# Altium PCB 三轮主控板基础板2.3.PcbDoc (part 2 of 2)
Units mil, origin at the board's own origin, x right, y up, seen from the top; angles counter-clockwise.
Board outline 6000 x 4000 mil, 2 copper layers (Top Layer, Bottom Layer); 78 components, 90 nets, 319 pads, 48 vias.
Unrouted connection lines stored in the file: 1.
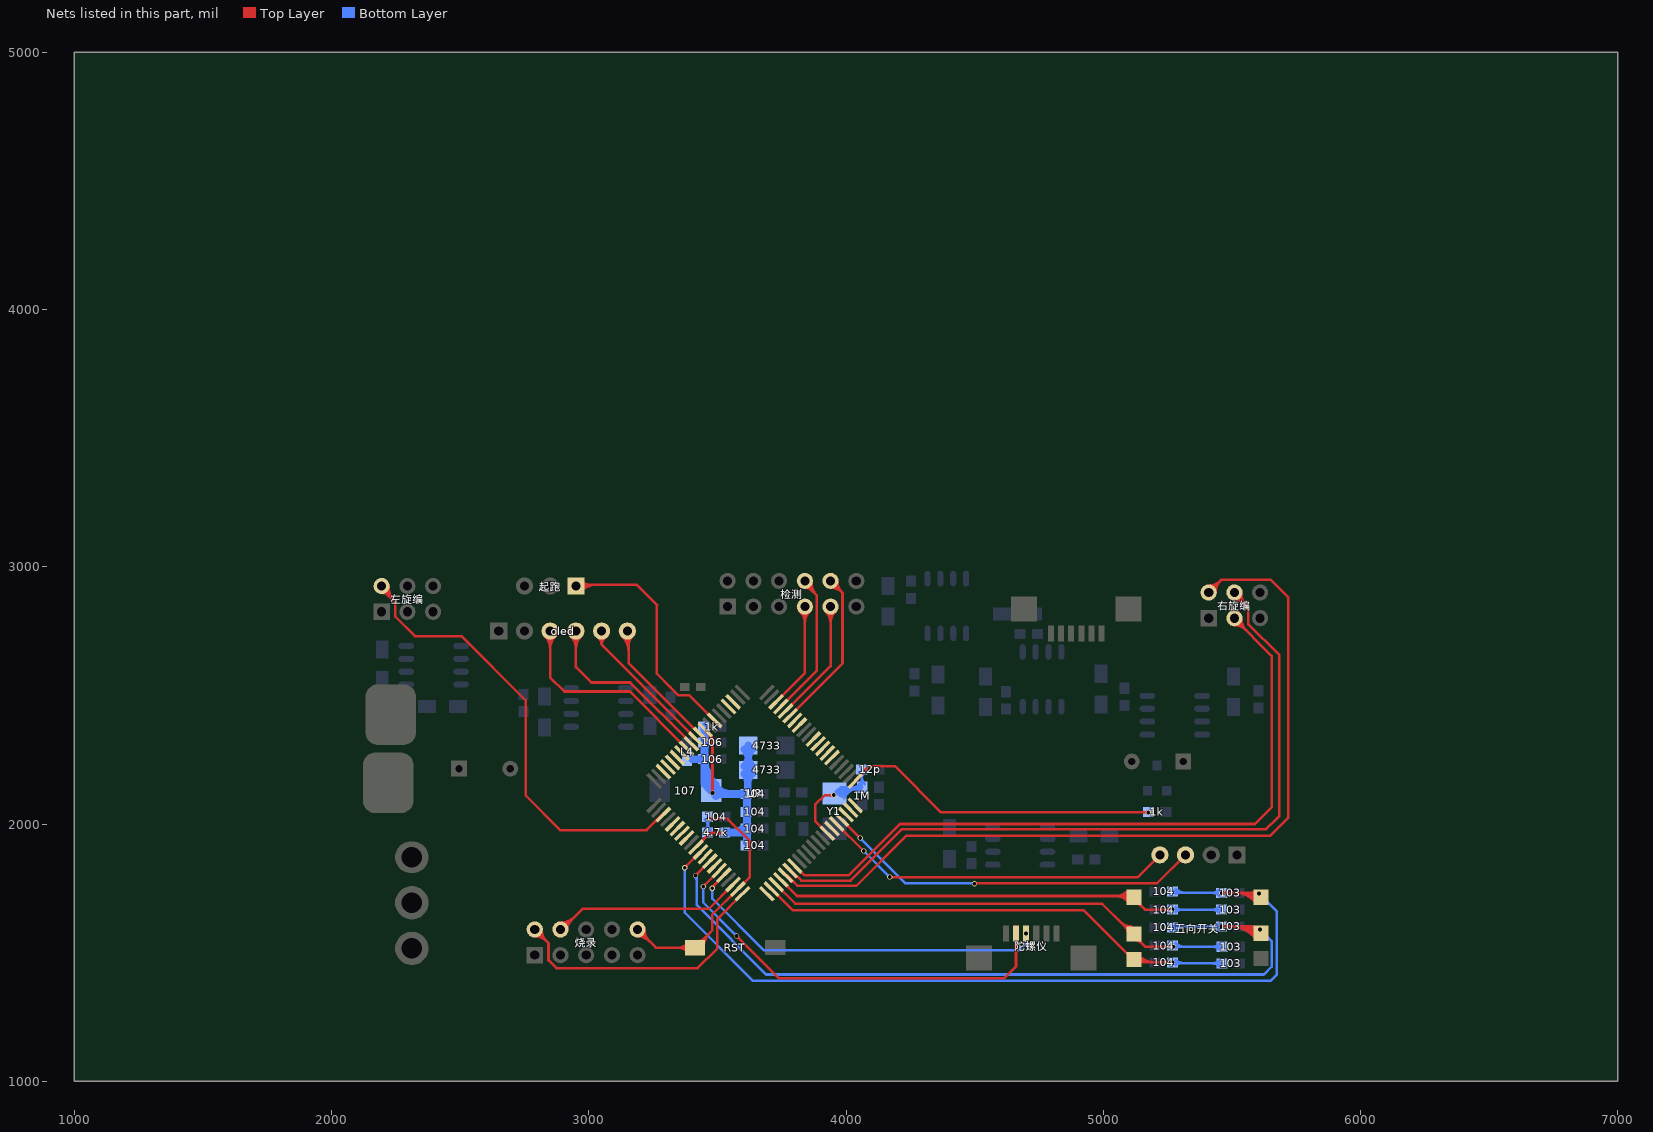
[diagram p2: the nets of this part, all layers, seen from the top]

## Via types
v1: diameter 20, hole 15, Top Layer to Bottom Layer, 41 vias
v2: diameter 30, hole 20, Top Layer to Bottom Layer, 4 vias
v3: diameter 50, hole 28, Top Layer to Bottom Layer, 3 vias

## Nets (pads, with @x,y where several pads share a name; then routed paths per layer and width w, separated by ;. In a path a pad name is that pad's centre, name@x,y a point inside that pad or via, vN(x,y) a via of type N, cw(c..) or ccw(c..) an arc to the next point about the centre after c; other vN are vias at no path point) (continued)
PTC7: U?.63 左旋编.2 | length 2384.2
  Top Layer w10: 左旋编.2@2191.5,2924.86 ccw(c2226.45,2926.29) 2217.4,2892.5 ; 左旋编.2@2195,2898.5 cw(c2195,2860.5) 2221.87,2887.37 ; 左旋编.2@2195,2925 2195,2914.24 2248.5,2860.74 2248.5,2805.74 2324.24,2730 2505,2730 2755,2480 2755,2110 2888.5,1976.5 3224.84,1976.5 3284.82,2036.48 U?.63@3290.05,2036.48 ; 左旋编.2@2193.93,2918.59 cw(c2188.7,2887.24) 2219.41,2895.46 ; 左旋编.2@2193.93,2918.59 cw(c2188.7,2887.24) 2219.41,2895.46 ; 左旋编.2@2193.93,2918.59 cw(c2188.7,2887.24) 2219.41,2895.46 ; 左旋编.2@2211.5,2925 ccw(c2277.29,2925) 2230.77,2878.48 ; 左旋编.2@2211.5,2925 ccw(c2277.29,2925) 2230.77,2878.48 ; 左旋编.2@2211.5,2925 ccw(c2277.29,2925) 2230.77,2878.48 ; 左旋编.2@2221.5,2925 ccw(c2311.43,2925) 2247.84,2861.41 ; 左旋编.2@2221.5,2925 ccw(c2311.43,2925) 2247.84,2861.41 ; 左旋编.2@2221.5,2925 ccw(c2311.43,2925) 2247.84,2861.41 ; 3256.32,2007.98 cw(c3268.48,1995.83) U?.63@3268.48,2013.02 ; 3256.32,2007.98 cw(c3268.48,1995.83) U?.63@3268.48,2013.02 ; 3256.32,2007.98 cw(c3268.48,1995.83) U?.63@3268.48,2013.02 ; 3260.29,2010.82 ccw(c3257.49,2021.25) U?.63@3266.84,2015.85 ; 3260.29,2010.82 ccw(c3257.49,2021.25) U?.63@3266.84,2015.85 ; 3260.29,2010.82 ccw(c3257.49,2021.25) U?.63@3266.84,2015.85
PTD0: 103.2@5462.07,1458 104.2@5269,1462 U?.2 五向开关.3 | length 2836
  Top Layer w10: U?.2@3710.42,1746.96 3792.38,1665 4922.93,1665 5109.15,1478.78 5125.93,1462 v1(5269,1462) ; 五向开关.3@5120.78,1470.07 cw(c5135.1,1459.33) 五向开关.3@5144.05,1474.83 ; 五向开关.3@5128.16,1463.28 cw(c5135.81,1457.04) 5140.75,1465.59 cw(c5147.82,1477.85) 五向开关.3@5133.67,1478.19 ; 五向开关.3@5128.78,1464.07 cw(c5144.18,1452.53) 5153.81,1469.2 ; 5256.93,1462 cw(c5256.93,1449.93) 5265.46,1458.46 ccw(c5256.93,1449.93) 5256.93,1462 ; 5256.93,1462 ccw(c5256.93,1474.07) 5265.46,1465.54 cw(c5256.93,1474.07) 5256.93,1462 ; 五向开关.3@5105.28,1474.91 ccw(c5136.45,1506.08) 5136.45,1462 cw(c5136.45,1506.08) 五向开关.3@5105.28,1474.91 ; 五向开关.3@5112.35,1481.98 ccw(c5160.59,1530.22) 5160.59,1462 cw(c5160.59,1530.22) 五向开关.3@5112.35,1481.98 ; 五向开关.3@5119.42,1489.05 ccw(c5184.73,1554.36) 5184.73,1462 cw(c5184.73,1554.36) 五向开关.3@5119.42,1489.05 ; 五向开关.3@5126.49,1496.12 ccw(c5208.87,1578.5) 5208.87,1462 cw(c5208.87,1578.5) 五向开关.3@5126.49,1496.12
  Bottom Layer w10: 104.2@5273,1458 103.2@5462.07,1458 ; 104.2@5281.65,1460.27 ccw(c5278.14,1454.19) 104.2@5272.8,1458.75 ; 104.2@5272.8,1458.75 cw(c5278.78,1453.62) 104.2@5282.72,1460.44 ; 104.2@5272.8,1458.75 cw(c5278.78,1453.62) 104.2@5282.72,1460.44 ; 104.2@5272.8,1458.75 cw(c5278.78,1453.62) 104.2@5282.72,1460.44 ; 5424.65,1458 cw(c5424.65,1422.55) 5449.72,1447.62 ccw(c5424.65,1422.55) 5424.65,1458 ; 5424.65,1458 ccw(c5424.65,1493.45) 5449.72,1468.38 cw(c5424.65,1493.45) 5424.65,1458 ; 104.2@5272.54,1465.54 ccw(c5290.73,1483.73) 5290.73,1458 cw(c5290.73,1483.73) 104.2@5272.54,1465.54 ; 104.2@5274.28,1465.31 ccw(c5291.94,1482.97) 5291.94,1458 cw(c5291.94,1482.97) 104.2@5274.28,1465.31 ; 104.2@5281.35,1451.62 cw(c5296.76,1436.2) 5296.76,1458 ccw(c5296.76,1436.2) 104.2@5281.35,1451.62 ; 104.2@5281.35,1472.38 ccw(c5316.08,1507.11) 5316.08,1458 cw(c5316.08,1507.11) 104.2@5281.35,1472.38
PTD1: U?.1
PTD2: U?.58
PTD3: U?.57
PTD4: U?.56
PTD5: U?.28
PTD6: U?.27
PTD7: U?.26
PTE0: U?.76 陀螺仪.3 | length 1542.5
  Top Layer w10: v1@3475,1750 3526.25,1801.25 U?.76@3525.29,1801.25 ; v1@3485,1750 cw(c3509.14,1750) 3492.07,1767.07 ccw(c3509.14,1750) v1@3485,1750
  Bottom Layer w10: v1(3480,1750) 3480,1710 3680,1510 4675,1510 4700,1535 v1(4700,1575) ; 3480,1737.93 cw(c3492.07,1737.93) 3483.54,1746.46 ccw(c3492.07,1737.93) 3480,1737.93 ; 3480,1737.93 ccw(c3467.93,1737.93) 3476.46,1746.46 cw(c3467.93,1737.93) 3480,1737.93
PTE1: U?.75 陀螺仪.2 | length 1838.4
  Top Layer w10: v1(3445,1757.14) U?.75@3507.2,1819.34 ; v1(3575,1565) 3740,1400 4614.57,1400 4660.94,1446.37 陀螺仪.2@4660.94,1573.98 ; 3453.54,1765.68 cw(c3445,1774.21) 3445,1762.14 ccw(c3445,1774.21) 3453.54,1765.68 ; 3453.54,1765.68 ccw(c3462.07,1757.14) 3450,1757.14 cw(c3462.07,1757.14) 3453.54,1765.68 ; 3583.54,1556.46 cw(c3592.07,1565) 3580,1565 ccw(c3592.07,1565) 3583.54,1556.46 ; 3583.54,1556.46 ccw(c3575,1547.93) 3575,1560 cw(c3575,1547.93) 3583.54,1556.46 ; 陀螺仪.2@4660.94,1587.85 cw(c4677.39,1587.85) 4665.76,1599.48 ccw(c4677.39,1587.85) 陀螺仪.2@4660.94,1587.85 ; 陀螺仪.2@4660.94,1587.85 ccw(c4644.5,1587.85) 4656.13,1599.48 cw(c4644.5,1587.85) 陀螺仪.2@4660.94,1587.85
  Bottom Layer w10: v1(3445,1757.14) 3445,1695 v1(3575,1565) ; 3445,1745.07 cw(c3457.07,1745.07) 3448.54,1753.61 ccw(c3457.07,1745.07) 3445,1745.07 ; 3445,1745.07 ccw(c3432.93,1745.07) 3441.46,1753.61 cw(c3432.93,1745.07) 3445,1745.07 ; 3566.46,1573.54 cw(c3557.93,1565) 3570,1565 ccw(c3557.93,1565) 3566.46,1573.54 ; 3566.46,1573.54 ccw(c3575,1582.07) 3575,1570 cw(c3575,1582.07) 3566.46,1573.54
PTE2: U?.68
PTE3: U?.67
PTE4: U?.47 起跑.1 | length 1379.5
  Top Layer w10: 起跑.1@2955,2930 3187,2930 3266,2851 3265,2850 3265,2584.03 3318.46,2530.57 3347.78,2501.25 3390.41,2501.25 U?.47@3489.1,2402.56 ; 起跑.1@2963.06,2911.94 cw(c3006.65,2868.35) 3006.65,2930 ; 起跑.1@2963.06,2911.94 cw(c3006.65,2868.35) 3006.65,2930 ; 起跑.1@2963.06,2911.94 cw(c3006.65,2868.35) 3006.65,2930 ; 起跑.1@2970.13,2904.87 cw(c3030.79,2844.21) 3030.79,2930 ; 起跑.1@2970.13,2904.87 cw(c3030.79,2844.21) 3030.79,2930 ; 起跑.1@2970.13,2904.87 cw(c3030.79,2844.21) 3030.79,2930 ; 起跑.1@2970.13,2945.13 ccw(c3006.65,2981.65) 3006.65,2930 ; 起跑.1@2970.13,2945.13 ccw(c3006.65,2981.65) 3006.65,2930 ; 起跑.1@2970.13,2945.13 ccw(c3006.65,2981.65) 3006.65,2930
PTE5: 1k.1@5176,2047 U?.21 | length 1341.5
  Top Layer w10: U?.21@4036.14,2167.33 U?.21@4043.81,2175 ; U?.21@4045,2175 U?.21@4043.81,2175 ; v1@5180,2045 4370,2045 4190,2225 4090,2225 4043.81,2178.81 U?.21@4043.81,2175 ; U?.21@4056.77,2190.54 ccw(c4051.37,2199.89) 4061.8,2197.09 ; U?.21@4056.77,2190.54 ccw(c4051.37,2199.89) 4061.8,2197.09 ; U?.21@4056.77,2190.54 ccw(c4051.37,2199.89) 4061.8,2197.09 ; U?.21@4059.6,2188.9 cw(c4073.36,2188.9) 4063.63,2198.63 ; U?.21@4059.6,2188.9 cw(c4073.36,2188.9) 4063.63,2198.63 ; U?.21@4059.6,2188.9 cw(c4073.36,2188.9) 4063.63,2198.63 ; 5162.93,2045 cw(c5162.93,2032.93) 5171.46,2041.46 ccw(c5162.93,2032.93) 5162.93,2045 ; 5162.93,2045 ccw(c5162.93,2057.07) 5171.46,2048.54 cw(c5162.93,2057.07) 5162.93,2045
  other v1: 5175,2045
PTE6: U?.20 | length 1.2
  Top Layer w10: U?.20@4036.14,2072.67 U?.20@4037.33,2072.67
PTE7: U?.6 右旋编.4 | length 3344.5
  Top Layer w10: U?.6@3787.2,1819.34 3826.54,1780 4018.28,1780 4218.28,1980 5633.28,1980 5675,2021.72 5685,2031.72 5685,2656.5 5563.5,2777.99 5563.5,2839.49 5510,2892.99 右旋编.4@5510,2900 ; 右旋编.4@5509.37,2893.53 cw(c5506.65,2865.59) 5533.77,2872.85 ; U?.6@3804.38,1795.87 cw(c3804.38,1780.69) 3815.11,1791.43 ; U?.6@3804.38,1795.87 cw(c3804.38,1780.69) 3815.11,1791.43 ; U?.6@3804.38,1795.87 cw(c3804.38,1780.69) 3815.11,1791.43 ; U?.6@3806.01,1798.71 ccw(c3815.36,1804.11) 3812.57,1793.68 ; U?.6@3806.01,1798.71 ccw(c3815.36,1804.11) 3812.57,1793.68 ; U?.6@3806.01,1798.71 ccw(c3815.36,1804.11) 3812.57,1793.68 ; 右旋编.4@5510,2873.5 cw(c5510,2826.46) 5543.27,2859.72 ccw(c5510,2826.46) 右旋编.4@5510,2873.5 ; 右旋编.4@5526.5,2900 ccw(c5583.24,2900) 5543.12,2859.88 cw(c5583.24,2900) 右旋编.4@5526.5,2900 ; 右旋编.4@5536.5,2900 ccw(c5617.38,2900) 5560.19,2842.81 cw(c5617.38,2900) 右旋编.4@5536.5,2900
PTF0: U?.55
PTF1: U?.54
PTF2: U?.44
PTF3: U?.43
PTF4: U?.38 检测.7 | length 641.8
  Top Layer w10: U?.38@3728.52,2474.95 3785,2531.43 3840,2586.43 检测.7@3840,2845 ; 检测.7@3821.26,2826.26 cw(c3776.03,2781.03) 3840,2781.03 cw(c3903.97,2781.03) 检测.7@3858.74,2826.26 ; 3840,2805.18 cw(c3879.82,2805.18) 3851.66,2833.34 ccw(c3879.82,2805.18) 3840,2805.18 ; 3840,2805.18 ccw(c3800.18,2805.18) 3828.34,2833.34 cw(c3800.18,2805.18) 3840,2805.18
PTF5: U?.37 检测.8 | length 804.1
  Top Layer w10: U?.37@3746.61,2456.85 3825,2535.24 3825.24,2535.24 3886.5,2596.5 3886.5,2888.5 ; 检测.8@3840,2918.5 cw(c3840,2878.68) 3868.16,2906.84 ; 检测.8@3840,2945 3840,2935 3886.5,2888.5 ; 3886.49,2888.51 cw(c3935.48,2937.5) 3866.41,2942.92 ccw(c3935.48,2937.5) 3886.49,2888.51 ; 检测.8@3856.45,2943.71 ccw(c3907.04,2939.73) 3871.15,2903.85 cw(c3907.04,2939.73) 检测.8@3856.45,2943.71
PTF6: U?.36 检测.9 | length 704.4
  Top Layer w10: U?.36@3764.71,2438.75 3940,2614.04 检测.9@3940,2845 ; 检测.9@3921.26,2826.26 cw(c3876.03,2781.03) 3940,2781.03 cw(c4003.97,2781.03) 检测.9@3958.74,2826.26 ; 3940,2805.18 cw(c3979.82,2805.18) 3951.66,2833.34 ccw(c3979.82,2805.18) 3940,2805.18 ; 3940,2805.18 ccw(c3900.18,2805.18) 3928.34,2833.34 cw(c3900.18,2805.18) 3940,2805.18
PTF7: U?.35 检测.10 | length 954
  Top Layer w10: U?.35@3782.8,2420.66 3986.5,2624.35 3986.5,2898.5 检测.10@3940,2945 ; 3968.16,2916.84 cw(c3996.32,2945) 3956.5,2945 ccw(c3996.32,2945) 3968.16,2916.84 ; 3968.16,2916.84 ccw(c3940,2888.68) 3940,2928.5 cw(c3940,2888.68) 3968.16,2916.84 ; 3985.23,2899.77 cw(c4030.46,2945) 3966.5,2945 ccw(c4030.46,2945) 3985.23,2899.77 ; 3985.23,2899.77 ccw(c3940,2854.54) 3940,2918.5 cw(c3940,2854.54) 3985.23,2899.77
PTG0: U?.74
PTG1: 103.1@5459.93,1602 104.1@5269,1598 U?.73 五向开关.5 | length 4445
  Top Layer w10: v1(3415.48,1800) U?.73@3471.01,1855.53 ; v1(5459.93,1602) 5580.85,1602 ; 5552.21,1593.65 ccw(c5566.4,1617.6) 五向开关.5@5585.78,1597.61 ; 5563.47,1586.97 ccw(c5575.84,1607.86) 五向开关.5@5592.74,1590.43 ; 5578.69,1575.76 ccw(c5547.36,1570.25) 5563.27,1597.8 ccw(c5574.36,1617.02) 五向开关.5@5587.89,1599.44 ; 五向开关.5@5602.85,1580 5580.85,1602 ; 3424.01,1808.54 cw(c3415.48,1817.07) 3415.48,1805 ccw(c3415.48,1817.07) 3424.01,1808.54 ; 3424.01,1808.54 ccw(c3432.55,1800) 3420.48,1800 cw(c3432.55,1800) 3424.01,1808.54 ; 5472,1602 cw(c5472,1614.07) 5463.46,1605.54 ccw(c5472,1614.07) 5472,1602 ; 5472,1602 ccw(c5472,1589.93) 5463.46,1598.46 cw(c5472,1589.93) 5472,1602 ; 5580.85,1602 ccw(c5600.85,1621.99) 五向开关.5@5608.62,1594.81 ; 5580.85,1602 ccw(c5600.85,1621.99) 五向开关.5@5608.62,1594.81 ; 5582.45,1597.88 ccw(c5599.11,1626.74) 五向开关.5@5608.58,1594.79 ; 5582.45,1597.88 ccw(c5599.11,1626.74) 五向开关.5@5608.58,1594.79 ; 5582.45,1597.88 ccw(c5599.11,1626.74) 五向开关.5@5608.58,1594.79 ; 5490.52,1602 cw(c5490.52,1467.67) 5585.51,1562.66 ccw(c5490.52,1467.67) 5490.52,1602 ; 5514.66,1602 cw(c5514.66,1491.81) 5592.58,1569.73 ccw(c5514.66,1491.81) 5514.66,1602 ; 5538.81,1602 cw(c5538.81,1515.96) 5599.65,1576.8 ccw(c5538.81,1515.96) 5538.81,1602 ; 5562.95,1602 cw(c5562.95,1540.1) 5606.72,1583.87 ccw(c5562.95,1540.1) 5562.95,1602 ; 五向开关.5@5592.86,1589.99 ccw(c5606.19,1603.31) 5611.38,1585.19 cw(c5606.19,1603.31) 五向开关.5@5592.86,1589.99
  Bottom Layer w10: v1(3415.48,1800) 3420,1795.48 3420,1684.64 3689.64,1415 5625,1415 5655,1445 5655,1545 v1(5610,1590) ; 3417.67,1786.55 cw(c3424.75,1790.64) v1@3419,1796.45 ; 104.1@5273,1602 v1(5459.93,1602) ; 5422.51,1602 cw(c5422.51,1566.55) 5447.58,1591.62 ccw(c5422.51,1566.55) 5422.51,1602 ; 5422.51,1602 ccw(c5422.51,1637.45) 5447.58,1612.38 cw(c5422.51,1637.45) 5422.51,1602 ; 103.1@5447.86,1602 cw(c5447.86,1589.93) 5456.39,1598.46 ccw(c5447.86,1589.93) 103.1@5447.86,1602 ; 103.1@5447.86,1602 ccw(c5447.86,1614.07) 5456.39,1605.54 cw(c5447.86,1614.07) 103.1@5447.86,1602 ; 5618.54,1581.46 cw(c5627.07,1590) 5615,1590 ccw(c5627.07,1590) 5618.54,1581.46 ; 5618.54,1581.46 ccw(c5610,1572.93) 5610,1585 cw(c5610,1572.93) 5618.54,1581.46 ; v1@3411.94,1796.46 cw(c3392.49,1777.01) 3420,1777.01 ccw(c3392.49,1777.01) v1@3411.94,1796.46 ; 104.1@5274.28,1594.69 cw(c5291.94,1577.03) 5291.94,1602 ccw(c5291.94,1577.03) 104.1@5274.28,1594.69 ; 104.1@5281.35,1587.62 cw(c5316.08,1552.89) 5316.08,1602 ccw(c5316.08,1552.89) 104.1@5281.35,1587.62 ; 104.1@5281.35,1608.38 ccw(c5296.76,1623.8) 5296.76,1602 cw(c5296.76,1623.8) 104.1@5281.35,1608.38
PTG2: U?.72
PTG3: 103.1@5461,1732 104.1@5269,1738 U?.71 五向开关.6 | length 4414
  Top Layer w10: v1(3373.09,1830) U?.71@3434.82,1891.72 ; v1(5461,1732) 五向开关.6@5590.85,1732 ; 五向开关.6@5602.85,1720 五向开关.6@5590.85,1732 ; v1@3373.09,1835 ccw(c3373.09,1847.07) 3381.63,1838.54 ; v1@3373.09,1835 ccw(c3373.09,1847.07) 3381.63,1838.54 ; v1@3373.09,1835 ccw(c3373.09,1847.07) 3381.63,1838.54 ; v1@3378.09,1830 cw(c3390.16,1830) 3381.63,1838.54 ; v1@3378.09,1830 cw(c3390.16,1830) 3381.63,1838.54 ; v1@3378.09,1830 cw(c3390.16,1830) 3381.63,1838.54 ; 5473.07,1732 cw(c5473.07,1744.07) 5464.54,1735.54 ccw(c5473.07,1744.07) 5473.07,1732 ; 5473.07,1732 ccw(c5473.07,1719.93) 5464.54,1728.46 cw(c5473.07,1719.93) 5473.07,1732 ; 5579.13,1727.01 ccw(c5586.1,1744.5) 五向开关.6@5601.03,1733.04 ; 5579.13,1727.01 ccw(c5586.1,1744.5) 五向开关.6@5601.03,1733.04 ; 5579.13,1727.01 ccw(c5586.1,1744.5) 五向开关.6@5601.03,1733.04 ; 五向开关.6@5590.85,1732 cw(c5590.85,1719.2) 5601.03,1726.97 ccw(c5590.85,1719.2) 五向开关.6@5590.85,1732 ; 五向开关.6@5591.41,1722.12 ccw(c5596.99,1736.14) 五向开关.6@5608.97,1726.96 ; 五向开关.6@5591.41,1722.12 ccw(c5596.99,1736.14) 五向开关.6@5608.97,1726.96 ; 五向开关.6@5591.41,1722.12 ccw(c5596.99,1736.14) 五向开关.6@5608.97,1726.96 ; 5514.66,1732 cw(c5514.66,1631.81) 5585.51,1702.66 ccw(c5514.66,1631.81) 5514.66,1732 ; 5538.81,1732 cw(c5538.81,1655.96) 5592.58,1709.73 ccw(c5538.81,1655.96) 5538.81,1732 ; 5562.95,1732 cw(c5562.95,1680.1) 5599.65,1716.8 ccw(c5562.95,1680.1) 5562.95,1732 ; 5572.61,1732 ccw(c5572.61,1750.24) 5585.51,1737.34 cw(c5572.61,1750.24) 5572.61,1732 ; 五向开关.6@5588.1,1732 cw(c5588.1,1713.1) 5601.46,1726.46 ccw(c5588.1,1713.1) 五向开关.6@5588.1,1732
  Bottom Layer w10: v1(3373.09,1830) 3373.09,1655.69 3638.79,1390 5650,1390 5675,1415 5675,1660 v1(5605,1730) ; 104.1@5275,1732 v1(5461,1732) ; 3373.09,1817.93 cw(c3385.16,1817.93) 3376.63,1826.46 ccw(c3385.16,1817.93) 3373.09,1817.93 ; 3373.09,1817.93 ccw(c3361.02,1817.93) 3369.56,1826.46 cw(c3361.02,1817.93) 3373.09,1817.93 ; 5423.58,1732 cw(c5423.58,1696.55) 5448.65,1721.62 ccw(c5423.58,1696.55) 5423.58,1732 ; 5423.58,1732 ccw(c5423.58,1767.45) 5448.65,1742.38 cw(c5423.58,1767.45) 5423.58,1732 ; 103.1@5448.93,1732 cw(c5448.93,1719.93) 5457.46,1728.46 ccw(c5448.93,1719.93) 103.1@5448.93,1732 ; 103.1@5448.93,1732 ccw(c5448.93,1744.07) 5457.46,1735.54 cw(c5448.93,1744.07) 103.1@5448.93,1732 ; 5613.54,1721.46 cw(c5622.07,1730) 5610,1730 ccw(c5622.07,1730) 5613.54,1721.46 ; 5613.54,1721.46 ccw(c5605,1712.93) 5605,1725 cw(c5605,1712.93) 5613.54,1721.46 ; 104.1@5274.28,1741.31 ccw(c5296.76,1763.8) 5296.76,1732 cw(c5296.76,1763.8) 104.1@5274.28,1741.31 ; 104.1@5281.35,1727.62 cw(c5291.94,1717.03) 5291.94,1732 ccw(c5291.94,1717.03) 104.1@5281.35,1727.62 ; 104.1@5281.35,1748.38 ccw(c5320.91,1787.94) 5320.91,1732 cw(c5320.91,1787.94) 104.1@5281.35,1748.38
PTG4: oled.3 U?.53 | length 1184.9
  Top Layer w10: oled.3@2840,2750 2850,2740 2850,2570 2905,2515 3159.52,2515 U?.53@3380.53,2293.99 ; 2850,2681.28 cw(c2918.72,2681.28) 2870.13,2729.87 ccw(c2918.72,2681.28) 2850,2681.28 ; 2850,2681.28 ccw(c2781.28,2681.28) 2829.87,2729.87 cw(c2781.28,2681.28) 2850,2681.28 ; 2850,2705.42 cw(c2894.58,2705.42) 2863.06,2736.94 ccw(c2894.58,2705.42) 2850,2705.42 ; 2850,2705.42 ccw(c2805.42,2705.42) 2836.94,2736.94 cw(c2805.42,2705.42) 2850,2705.42
PTG5: oled.4 U?.52 | length 1068.7
  Top Layer w10: oled.4@2950,2750 2950,2610 3010,2550 3160.71,2550 U?.52@3398.63,2312.09 U?.52@3397.91,2312.09 ; 2950,2681.28 cw(c3018.72,2681.28) 2970.13,2729.87 ccw(c3018.72,2681.28) 2950,2681.28 ; 2950,2681.28 ccw(c2881.28,2681.28) 2929.87,2729.87 cw(c2881.28,2681.28) 2950,2681.28 ; 2950,2705.42 cw(c2994.58,2705.42) 2963.06,2736.94 ccw(c2994.58,2705.42) 2950,2705.42 ; 2950,2705.42 ccw(c2905.42,2705.42) 2936.94,2736.94 cw(c2905.42,2705.42) 2950,2705.42
PTG6: oled.5 U?.51 | length 800.7
  Top Layer w10: oled.5@3050,2750 3050,2696.91 ; U?.51@3416.72,2330.18 3050,2696.91 ; 3050,2696.91 cw(c3085.28,2696.91) 3065.75,2726.29 ccw(c3085.28,2696.91) 3050,2696.91 ; 3050,2696.91 ccw(c3014.72,2696.91) 3034.25,2726.29 cw(c3014.72,2696.91) 3050,2696.91 ; 3050,2715.56 cw(c3072.89,2715.56) 3060.22,2734.62 ccw(c3072.89,2715.56) 3050,2715.56 ; 3050,2715.56 ccw(c3027.11,2715.56) 3039.78,2734.62 cw(c3027.11,2715.56) 3050,2715.56
PTG7: oled.6 U?.50 | length 822
  Top Layer w10: oled.6@3155,2750 3155,2625 U?.50@3413.34,2366.66 ; 3155,2693.35 cw(c3206.65,2693.35) 3170.13,2729.87 ccw(c3206.65,2693.35) 3155,2693.35 ; 3155,2693.35 ccw(c3093.35,2693.35) 3136.94,2736.94 cw(c3093.35,2693.35) 3155,2693.35 ; oled.6@3129.87,2729.87 cw(c3069.21,2669.21) 3155,2669.21 ccw(c3069.21,2669.21) oled.6@3129.87,2729.87 ; 3404.73,2375.27 ccw(c3413.24,2383.77) 3413.24,2371.74 cw(c3413.24,2383.77) 3404.73,2375.27
PTH0: U?.19
PTH1: U?.18
PTH2: U?.7 右旋编.3 | length 3114.2
  Top Layer w10: U?.7@3800.9,1837.44 3838.33,1800 4010,1800 4210,2000 5590,2000 5655,2065 5655,2653.72 右旋编.3@5510,2798.72 ; 右旋编.3@5510,2785 右旋编.3@5510,2798.72 ; 右旋编.3@5510,2800 右旋编.3@5510,2798.72 ; 右旋编.3@5510,2773.5 cw(c5510,2712.62) 5553.05,2755.67 ccw(c5510,2712.62) 右旋编.3@5510,2773.5 ; 右旋编.3@5510,2783.5 cw(c5510,2746.76) 5535.98,2772.74 ccw(c5510,2746.76) 右旋编.3@5510,2783.5 ; 右旋编.3@5526.5,2800 ccw(c5569.4,2800) 5539.06,2769.66 cw(c5569.4,2800) 右旋编.3@5526.5,2800 ; 右旋编.3@5536.5,2800 ccw(c5603.54,2800) 5556.13,2752.59 cw(c5603.54,2800) 右旋编.3@5536.5,2800
PTH3: U?.34
PTH4: U?.33
PTH5: U?.5 右旋编.2 | length 3688.9
  Top Layer w10: U?.5@3764.71,1801.25 3769.94,1801.25 3811.19,1760 4040,1760 4235,1955 5650,1955 5720,2025 5720,2880 5650,2950 5460,2950 右旋编.2@5410,2900 ; U?.5@3786.28,1777.78 cw(c3786.28,1760.59) 3798.44,1772.75 ; U?.5@3786.28,1777.78 cw(c3786.28,1760.59) 3798.44,1772.75 ; U?.5@3786.28,1777.78 cw(c3786.28,1760.59) 3798.44,1772.75 ; U?.5@3787.92,1780.62 ccw(c3797.27,1786.01) 3794.47,1775.59 ; U?.5@3787.92,1780.62 ccw(c3797.27,1786.01) 3794.47,1775.59 ; U?.5@3787.92,1780.62 ccw(c3797.27,1786.01) 3794.47,1775.59 ; 5438.16,2928.16 cw(c5410,2956.32) 5410,2916.5 ccw(c5410,2956.32) 5438.16,2928.16 ; 5438.16,2928.16 ccw(c5466.32,2900) 5426.5,2900 cw(c5466.32,2900) 5438.16,2928.16 ; 5455.23,2945.23 cw(c5410,2990.46) 5410,2926.5 ccw(c5410,2990.46) 5455.23,2945.23 ; 5455.23,2945.23 ccw(c5500.46,2900) 5436.5,2900 cw(c5500.46,2900) 5455.23,2945.23
PTH6: 103.1@5459.93,1667 104.2@5269,1667 U?.4 五向开关.1 | length 2648.5
  Top Layer w10: U?.4@3746.61,1783.15 3809.76,1720 5109.15,1720 5162.15,1667 v1(5269,1667) ; 五向开关.1@5091.81,1702.66 ccw(c5049.94,1660.79) 5049.94,1720 ; 五向开关.1@5110.25,1725.36 cw(c5102.54,1687.7) 五向开关.1@5139.67,1697.65 ; 5049.94,1720 ccw(c5049.94,1779.21) 5091.81,1737.34 cw(c5049.94,1779.21) 5049.94,1720 ; 5074.08,1720 cw(c5074.08,1684.93) 5098.88,1709.73 ccw(c5074.08,1684.93) 5074.08,1720 ; 5074.08,1720 ccw(c5074.08,1755.07) 5098.88,1730.27 cw(c5074.08,1755.07) 5074.08,1720 ; 五向开关.1@5133.95,1695.2 cw(c5158.75,1720) 5123.68,1720 ccw(c5158.75,1720) 五向开关.1@5133.95,1695.2 ; 五向开关.1@5133.95,1695.2 ccw(c5109.15,1670.4) 5109.15,1705.47 cw(c5109.15,1670.4) 五向开关.1@5133.95,1695.2 ; 5151.02,1678.13 cw(c5192.89,1720) 5133.68,1720 ccw(c5192.89,1720) 5151.02,1678.13 ; 5151.02,1678.13 ccw(c5109.15,1636.26) 5109.15,1695.47 cw(c5109.15,1636.26) 5151.02,1678.13 ; 5256.93,1667 cw(c5256.93,1654.93) 5265.46,1663.46 ccw(c5256.93,1654.93) 5256.93,1667 ; 5256.93,1667 ccw(c5256.93,1679.07) 5265.46,1670.54 cw(c5256.93,1679.07) 5256.93,1667
  Bottom Layer w10: v1(5269,1667) 103.1@5459.93,1667 ; 104.2@5281.07,1667 cw(c5281.07,1679.07) 5272.54,1670.54 ccw(c5281.07,1679.07) 104.2@5281.07,1667 ; 104.2@5281.07,1667 ccw(c5281.07,1654.93) 5272.54,1663.46 cw(c5281.07,1654.93) 104.2@5281.07,1667 ; 5306.42,1667 cw(c5306.42,1702.45) 5281.35,1677.38 ccw(c5306.42,1702.45) 5306.42,1667 ; 5306.42,1667 ccw(c5306.42,1631.55) 5281.35,1656.62 cw(c5306.42,1631.55) 5306.42,1667 ; 5422.51,1667 cw(c5422.51,1631.55) 5447.58,1656.62 ccw(c5422.51,1631.55) 5422.51,1667 ; 5422.51,1667 ccw(c5422.51,1702.45) 5447.58,1677.38 cw(c5422.51,1702.45) 5422.51,1667
PTH7: 103.2@5462.07,1523 104.2@5269,1527 U?.3 五向开关.2 | length 2756.1
  Top Layer w10: U?.3@3728.52,1765.05 3803.57,1690 4996.04,1690 5084.35,1601.69 ; 五向开关.2@5103.79,1575.79 ccw(c5141.45,1583.5) 五向开关.2@5131.5,1546.37 ; 五向开关.2@5110.25,1582.25 cw(c5102.54,1544.59) 五向开关.2@5139.67,1554.54 ; v1(5273,1523) 5163.04,1523 5084.35,1601.69 ; 5084.35,1601.69 cw(c5059.55,1576.89) 5094.62,1576.89 ccw(c5059.55,1576.89) 5084.35,1601.69 ; 5084.35,1601.69 ccw(c5109.15,1626.49) 5109.15,1591.42 cw(c5109.15,1626.49) 5084.35,1601.69 ; 五向开关.2@5133.95,1552.09 cw(c5158.75,1576.89) 5123.68,1576.89 ccw(c5158.75,1576.89) 五向开关.2@5133.95,1552.09 ; 五向开关.2@5133.95,1552.09 ccw(c5109.15,1527.29) 5109.15,1562.36 cw(c5109.15,1527.29) 五向开关.2@5133.95,1552.09 ; 5151.02,1535.02 cw(c5192.89,1576.89) 5133.68,1576.89 ccw(c5192.89,1576.89) 5151.02,1535.02 ; 5151.02,1535.02 ccw(c5109.15,1493.15) 5109.15,1552.36 cw(c5109.15,1493.15) 5151.02,1535.02 ; 5260.93,1523 cw(c5260.93,1510.93) 5269.46,1519.46 ccw(c5260.93,1510.93) 5260.93,1523 ; 5260.93,1523 ccw(c5260.93,1535.07) 5269.46,1526.54 cw(c5260.93,1535.07) 5260.93,1523 ; 5067.28,1618.76 ccw(c5109.15,1660.63) 5109.15,1601.42 cw(c5109.15,1660.63) 5067.28,1618.76
  Bottom Layer w10: v1(5273,1523) 103.2@5462.07,1523 ; 104.2@5285.07,1523 cw(c5285.07,1535.07) 5276.54,1526.54 ccw(c5285.07,1535.07) 104.2@5285.07,1523 ; 104.2@5285.07,1523 ccw(c5285.07,1510.93) 5276.54,1519.46 cw(c5285.07,1510.93) 104.2@5285.07,1523 ; 5424.65,1523 cw(c5424.65,1487.55) 5449.72,1512.62 ccw(c5424.65,1487.55) 5424.65,1523 ; 5424.65,1523 ccw(c5424.65,1558.45) 5449.72,1533.38 cw(c5424.65,1558.45) 5424.65,1523 ; 104.2@5274.28,1530.31 ccw(c5291.94,1547.97) 5291.94,1523 cw(c5291.94,1547.97) 104.2@5274.28,1530.31 ; 104.2@5281.35,1516.62 cw(c5296.76,1501.2) 5296.76,1523 ccw(c5296.76,1501.2) 104.2@5281.35,1516.62 ; 104.2@5281.35,1537.38 ccw(c5316.08,1572.11) 5316.08,1523 cw(c5316.08,1572.11) 104.2@5281.35,1537.38
PTI0: ?.3@5320,1880 U?.17 | length 1493.7
  Top Layer w10: U?.17@3981.85,2018.39 v1(4055.24,1945) ; v1@4500,1765 v1(4500,1767.5) ; v1@4500,1770 5210,1770 ?.3@5320,1880
  Bottom Layer w10: v1(4055.24,1945) 4230.24,1770 4495,1770 4500,1765 v1(4500,1767.5)
PTI1: ?.4 U?.16 | length 1379.5
  Top Layer w10: U?.16@3963.75,2000.29 v1(4069.05,1895) v1@4070,1895 ; v1(4170,1794.05) 4171.55,1792.5 5132.5,1792.5 ?.4@5220,1880
  Bottom Layer w10: v1(4069.05,1895) v1(4170,1794.05)
PTI2: U?.66
PTI3: U?.65
PTI4: U?.15
PTI5: U?.30
PTI6: U?.29
RESET: 4.7k.1 104.2@3462.07,2028 RST.1 U?.79 烧录.10 | length 2391.2
  Top Layer w10: 烧录.10@3190,1590 3260.79,1519.21 RST.1@3412.69,1519.21 3480,1586.53 3480,1647.38 U?.79@3579.58,1746.96 3625,1792.38 3625,1935 3540,2020 v1(3465,2020) ; RST.1@3421.07,1523.5 ccw(c3402.01,1579.44) 3459.1,1564.15 ; 3218.16,1561.84 cw(c3246.32,1590) 3206.5,1590 ccw(c3246.32,1590) 3218.16,1561.84 ; 3218.16,1561.84 ccw(c3190,1533.68) 3190,1573.5 cw(c3190,1533.68) 3218.16,1561.84 ; 3235.23,1544.77 ccw(c3190,1499.54) 3190,1563.5 cw(c3190,1499.54) 3235.23,1544.77 ; 3235.23,1544.77 cw(c3280.46,1590) 3216.5,1590 ccw(c3280.46,1590) 3235.23,1544.77 ; 3343.63,1519.21 cw(c3343.63,1460) 3385.5,1501.87 ccw(c3343.63,1460) 3343.63,1519.21 ; 3343.63,1519.21 ccw(c3343.63,1578.43) 3385.5,1536.56 cw(c3343.63,1578.43) 3343.63,1519.21 ; 3367.77,1519.21 cw(c3367.77,1484.14) 3392.57,1508.94 ccw(c3367.77,1484.14) 3367.77,1519.21 ; 3367.77,1519.21 ccw(c3367.77,1554.29) 3392.57,1529.49 cw(c3367.77,1554.29) 3367.77,1519.21 ; v1@3468.54,2016.46 cw(c3477.07,2007.93) 3477.07,2020 ; v1@3468.54,2016.46 cw(c3477.07,2007.93) 3477.07,2020 ; v1@3468.54,2016.46 cw(c3477.07,2007.93) 3477.07,2020 ; v1@3468.54,2023.54 ccw(c3477.07,2032.07) 3477.07,2020 ; v1@3468.54,2023.54 ccw(c3477.07,2032.07) 3477.07,2020 ; v1@3468.54,2023.54 ccw(c3477.07,2032.07) 3477.07,2020 ; RST.1@3422.53,1543.74 ccw(c3422.53,1579.19) 3447.6,1554.13 cw(c3422.53,1579.19) RST.1@3422.53,1543.74 ; RST.1@3437.06,1519.21 cw(c3495.89,1519.21) 3454.29,1560.82 ccw(c3495.89,1519.21) RST.1@3437.06,1519.21 ; RST.1@3447.06,1519.21 cw(c3530.03,1519.21) 3471.36,1577.89 ccw(c3530.03,1519.21) RST.1@3447.06,1519.21
  Bottom Layer w10: 4.7k.1@3462.99,1982.01 3462.99,2020 104.2@3462.99,2028 ; 104.2@3451.69,2017.62 cw(c3424.39,1990.32) 3462.99,1990.32 ; 104.2@3451.69,2017.62 cw(c3424.39,1990.32) 3462.99,1990.32 ; 104.2@3451.69,2017.62 cw(c3424.39,1990.32) 3462.99,1990.32 ; 4.7k.1@3452.58,1977.38 ccw(c3427.46,2002.51) 3462.99,2002.51 ; 4.7k.1@3452.58,1977.38 ccw(c3427.46,2002.51) 3462.99,2002.51 ; 4.7k.1@3452.58,1977.38 ccw(c3427.46,2002.51) 3462.99,2002.51 ; 3462.99,1994.77 cw(c3495.3,1994.77) 104.2@3472.45,2017.62 ; 3462.99,1994.77 cw(c3495.3,1994.77) 104.2@3472.45,2017.62 ; 3462.99,1994.77 cw(c3495.3,1994.77) 104.2@3472.45,2017.62 ; 3462.99,2002.4 ccw(c3498.36,2002.4) 4.7k.1@3473.35,1977.38 ; 3462.99,2002.4 ccw(c3498.36,2002.4) 4.7k.1@3473.35,1977.38 ; 3462.99,2002.4 ccw(c3498.36,2002.4) 4.7k.1@3473.35,1977.38 ; 3462.99,2003.08 cw(c3481.92,2003.08) 104.2@3468.54,2016.46 ; 3462.99,2003.08 cw(c3481.92,2003.08) 104.2@3468.54,2016.46 ; 3462.99,2003.08 cw(c3481.92,2003.08) 104.2@3468.54,2016.46
SWD_CLK: U?.78 烧录.4 | length 1074.1
  Top Layer w10: 烧录.4@2890,1598.57 烧录.4@2890,1590 2896.43,1590 2976.43,1670 3466.43,1670 U?.78@3561.48,1765.05 ; 烧录.4@2896.47,1589.44 cw(c2923.9,1587.08) 2916.78,1613.67 ; 烧录.4@2890,1606.5 ccw(c2890,1661.85) 2929.14,1622.71 cw(c2890,1661.85) 烧录.4@2890,1606.5 ; 烧录.4@2890,1616.5 ccw(c2890,1695.99) 2946.21,1639.78 cw(c2890,1695.99) 烧录.4@2890,1616.5 ; 烧录.4@2916.5,1590 cw(c2964.94,1590) 2930.68,1624.25 ccw(c2964.94,1590) 烧录.4@2916.5,1590
SWD_DIO: U?.80 烧录.2 | length 1371
  Top Layer w10: 烧录.2@2790,1590 2843.5,1536.5 2843.5,1470.74 2874.24,1440 2885,1440 3423.58,1440 3500,1516.42 3500,1631.19 U?.80@3597.67,1728.86 ; 烧录.2@2816.5,1590 ccw(c2880.46,1590) 2835.23,1544.77 ; 2818.16,1561.84 cw(c2846.32,1590) 2806.5,1590 ccw(c2846.32,1590) 2818.16,1561.84 ; 2818.16,1561.84 ccw(c2790,1533.68) 2790,1573.5 cw(c2790,1533.68) 2818.16,1561.84 ; 2835.23,1544.77 ccw(c2790,1499.54) 2790,1563.5 cw(c2790,1499.54) 2835.23,1544.77
VDD: 1k.2@3447.07,2378 4.7k.2 104.1@3611,1917 104.1@3611,1982 104.1@3611,2047 104.1@3611,2117 106.1@3446,2252 106.1@3446,2317 107.1 4733.K L4.2 U?.49 U?.70 | length 3608.2
  Top Layer w10: U?.70@3416.72,1909.82 3471.91,1965 v1(3525,1965) ; U?.49@3452.91,2366.37 3452.91,2361.14 3481.13,2332.92 ; v1(3481.13,2121.13) 3481.13,2332.92 ; U?.49@3473.51,2343.18 cw(c3467.91,2333.95) 3478.4,2336.52 ; U?.49@3473.51,2343.18 cw(c3467.91,2333.95) 3478.4,2336.52 ; U?.49@3473.51,2343.18 cw(c3467.91,2333.95) 3478.4,2336.52 ; U?.49@3476.38,2344.76 ccw(c3492.63,2344.41) 3481.13,2332.92 ; U?.49@3476.38,2344.76 ccw(c3492.63,2344.41) 3481.13,2332.92 ; U?.49@3476.38,2344.76 ccw(c3492.63,2344.41) 3481.13,2332.92 ; v1@3477.6,2124.67 ccw(c3469.06,2133.21) 3481.13,2133.21 ; v1@3477.6,2124.67 ccw(c3469.06,2133.21) 3481.13,2133.21 ; v1@3477.6,2124.67 ccw(c3469.06,2133.21) 3481.13,2133.21 ; 3481.13,2133.21 ccw(c3493.21,2133.21) v1@3484.67,2124.67 ; 3481.13,2133.21 ccw(c3493.21,2133.21) v1@3484.67,2124.67 ; 3481.13,2133.21 ccw(c3493.21,2133.21) v1@3484.67,2124.67 ; 3512.93,1965 cw(c3512.93,1952.93) v1@3521.46,1961.46 ; 3512.93,1965 ccw(c3512.93,1977.07) v1@3521.46,1968.54 ; 3512.93,1965 cw(c3512.93,1952.93) v1@3521.46,1961.46 ; 3512.93,1965 ccw(c3512.93,1977.07) v1@3521.46,1968.54 ; 3512.93,1965 ccw(c3512.93,1977.07) v1@3521.46,1968.54 ; 3512.93,1965 cw(c3512.93,1952.93) v1@3521.46,1961.46
  Bottom Layer w10: 107.1@3476,2130 3488,2117 3476,2129 107.1@3476,2130 ; 107.1@3476,2130 107.1@3476,2140 ; 107.1@3476,2140 ccw(c3493.63,2140) 107.1@3483.89,2125.3 ; 107.1@3476,2140 ccw(c3493.63,2140) 107.1@3483.89,2125.3 ; 107.1@3476,2140 ccw(c3493.63,2140) 107.1@3483.89,2125.3 ; 4.7k.2@3529.57,1962.97 cw(c3544.18,1956.48) 4.7k.2@3538.43,1971.4 ; 4.7k.2@3529.57,1962.97 cw(c3544.18,1956.48) 4.7k.2@3538.43,1971.4 ; 4.7k.2@3529.57,1962.97 cw(c3544.18,1956.48) 4.7k.2@3538.43,1971.4 ; 4.7k.2@3529.88,1963.9 cw(c3540,1961.63) 4.7k.2@3540,1972 ; 4.7k.2@3529.88,1963.9 cw(c3540,1961.63) 4.7k.2@3540,1972 ; 4.7k.2@3529.88,1963.9 cw(c3540,1961.63) 4.7k.2@3540,1972 ; 4.7k.2@3540,1972 3527.01,1972 3527.01,1967 4.7k.2@3540,1972
  Bottom Layer w30: 3402.01,2252 106.1@3450,2252 ; 1k.2@3447.99,2378 3450,2375.99 3450,2317 106.1@3450,2252 ; 4.7k.2@3527.01,1967 3595,1967 104.1@3610,1982 ; 104.1@3615,1927 3615,2047 3615,2117 3489,2117 107.1@3476,2130 3450,2156 106.1@3450,2252 ; 104.1@3618.01,2135.01 3618.01,2207.89 4733.K@3620.12,2210 4733.K@3620.12,2305 ; 3450,2183.07 ccw(c3520.83,2183.07) 107.1@3472.57,2131.23 ; 3450,2183.07 ccw(c3520.83,2183.07) 107.1@3472.57,2131.23 ; 3450,2183.07 ccw(c3520.83,2183.07) 107.1@3472.57,2131.23 ; 106.1@3450,2251.99 ccw(c3585,2251.99) 107.1@3493.01,2153.19 ; 106.1@3450,2251.99 ccw(c3585,2251.99) 107.1@3493.01,2153.19 ; 106.1@3450,2251.99 ccw(c3585,2251.99) 107.1@3493.01,2153.19 ; 107.1@3457.56,2151.74 ccw(c3426.43,2180.14) 3462.15,2202.49 ; 107.1@3457.56,2151.74 ccw(c3426.43,2180.14) 3462.15,2202.49 ; 107.1@3457.56,2151.74 ccw(c3426.43,2180.14) 3462.15,2202.49 ; 107.1@3493.65,2107.43 cw(c3516.76,2084.32) 3516.76,2117 ; 107.1@3493.65,2107.43 cw(c3516.76,2084.32) 3516.76,2117 ; 107.1@3493.65,2107.43 cw(c3516.76,2084.32) 3516.76,2117 ; 107.1@3493.65,2142.73 ccw(c3555.76,2204.84) 3555.76,2117 ; 107.1@3493.65,2142.73 ccw(c3555.76,2204.84) 3555.76,2117 ; 107.1@3493.65,2142.73 ccw(c3555.76,2204.84) 3555.76,2117 ; 3561.51,1967 ccw(c3561.51,2029.52) 104.1@3605.72,1985.31 ; 3561.51,1967 ccw(c3561.51,2029.52) 104.1@3605.72,1985.31 ; 3561.51,1967 ccw(c3561.51,2029.52) 104.1@3605.72,1985.31 ; 3587.51,1974.8 cw(c3600.89,1951.63) 104.1@3607.82,1977.47 ; 3587.51,1974.8 cw(c3600.89,1951.63) 104.1@3607.82,1977.47 ; 3587.51,1974.8 cw(c3600.89,1951.63) 104.1@3607.82,1977.47 ; 4733.K@3605.67,2195.55 cw(c3575.87,2165.76) 3618.01,2165.76 ; 4733.K@3605.67,2195.55 cw(c3575.87,2165.76) 3618.01,2165.76 ; 4733.K@3605.67,2195.55 cw(c3575.87,2165.76) 3618.01,2165.76 ; 4733.K@3605.67,2224.45 ccw(c3570.79,2259.33) 3620.12,2259.33 ; 4733.K@3605.67,2224.45 ccw(c3570.79,2259.33) 3620.12,2259.33 ; 4733.K@3605.67,2224.45 ccw(c3570.79,2259.33) 3620.12,2259.33 ; 4733.K@3605.67,2290.55 cw(c3570.79,2255.67) 3620.12,2255.67 ; 4733.K@3605.67,2290.55 cw(c3570.79,2255.67) 3620.12,2255.67 ; 4733.K@3605.67,2290.55 cw(c3570.79,2255.67) 3620.12,2255.67 ; 104.1@3609.66,2120.31 ccw(c3589.48,2140.49) 3618.01,2140.49 ; 104.1@3609.66,2120.31 ccw(c3589.48,2140.49) 3618.01,2140.49 ; 104.1@3609.66,2120.31 ccw(c3589.48,2140.49) 3618.01,2140.49 ; 3618.01,2155.59 cw(c3674.53,2155.59) 4733.K@3634.57,2195.55 ; 3618.01,2155.59 cw(c3674.53,2155.59) 4733.K@3634.57,2195.55 ; 3618.01,2155.59 cw(c3674.53,2155.59) 4733.K@3634.57,2195.55 ; 3620.12,2255.67 cw(c3669.45,2255.67) 4733.K@3634.57,2290.55 ; 3620.12,2255.67 cw(c3669.45,2255.67) 4733.K@3634.57,2290.55 ; 3620.12,2255.67 cw(c3669.45,2255.67) 4733.K@3634.57,2290.55 ; 3620.12,2259.33 ccw(c3669.45,2259.33) 4733.K@3634.57,2224.45 ; 3620.12,2259.33 ccw(c3669.45,2259.33) 4733.K@3634.57,2224.45 ; 3620.12,2259.33 ccw(c3669.45,2259.33) 4733.K@3634.57,2224.45
XTAL: 1M.2 12p.1@4061,2212 U?.14 Y1.1 | length 2655.4
  Top Layer w10: U?.14@3927.56,1964.1 3880,2011.67 3880,2075 3917.5,2112.5 v1(3952.5,2112.5) ; 3940.43,2112.5 cw(c3940.43,2100.43) v1@3948.96,2108.96 ; 3940.43,2112.5 ccw(c3940.43,2124.57) v1@3948.96,2116.04 ; 3940.43,2112.5 cw(c3940.43,2100.43) v1@3948.96,2108.96 ; 3940.43,2112.5 ccw(c3940.43,2124.57) v1@3948.96,2116.04 ; 3940.43,2112.5 ccw(c3940.43,2124.57) v1@3948.96,2116.04 ; 3940.43,2112.5 cw(c3940.43,2100.43) v1@3948.96,2108.96
  Bottom Layer w10: Y1.1@3955,2118.9 3979.03,2142.93 1M.2@4063,2142.93 ; 1M.2@4061,2144.93 12p.1@4061,2212 ; Y1.1@3957.44,2119.7 cw(c3996.23,2098.94) Y1.1@3996.23,2142.93 ; Y1.1@3957.44,2119.7 cw(c3996.23,2098.94) Y1.1@3996.23,2142.93 ; Y1.1@3957.44,2119.7 cw(c3996.23,2098.94) Y1.1@3996.23,2142.93 ; Y1.1@3957.5,2112.5 cw(c3978.98,2112.5) Y1.1@3963.79,2127.69 ; Y1.1@3957.5,2112.5 cw(c3978.98,2112.5) Y1.1@3963.79,2127.69 ; Y1.1@3957.5,2112.5 cw(c3978.98,2112.5) Y1.1@3963.79,2127.69 ; Y1.1@3957.5,2112.66 cw(c3974.05,2113.2) Y1.1@3961.97,2124.52 ; Y1.1@3957.5,2112.66 cw(c3974.05,2113.2) Y1.1@3961.97,2124.52 ; Y1.1@3957.5,2112.66 cw(c3974.05,2113.2) Y1.1@3961.97,2124.52 ; Y1.1@3957.5,2112.66 cw(c3974.05,2113.2) Y1.1@3961.97,2124.52 ; Y1.1@3957.5,2112.66 cw(c3974.05,2113.2) Y1.1@3961.97,2124.52 ; Y1.1@3957.5,2112.66 cw(c3974.05,2113.2) Y1.1@3961.97,2124.52 ; Y1.1@3966.26,2114.98 cw(c4012.92,2090.01) 4012.92,2142.93 ; Y1.1@3966.26,2114.98 cw(c4012.92,2090.01) 4012.92,2142.93 ; Y1.1@3966.26,2114.98 cw(c4012.92,2090.01) 4012.92,2142.93 ; Y1.1@3975.08,2110.26 cw(c4029.61,2081.08) 4029.61,2142.93 ; Y1.1@3975.08,2110.26 cw(c4029.61,2081.08) 4029.61,2142.93 ; Y1.1@3975.08,2110.26 cw(c4029.61,2081.08) 4029.61,2142.93 ; Y1.1@3983.9,2105.54 cw(c4046.3,2072.15) 1M.2@4046.3,2142.93 ; Y1.1@3983.9,2105.54 cw(c4046.3,2072.15) 1M.2@4046.3,2142.93 ; Y1.1@3983.9,2105.54 cw(c4046.3,2072.15) 1M.2@4046.3,2142.93 ; Y1.1@3992.71,2100.82 cw(c4063,2063.22) 1M.2@4063,2142.93 ; Y1.1@3992.71,2100.82 cw(c4063,2063.22) 1M.2@4063,2142.93 ; Y1.1@3992.71,2100.82 cw(c4063,2063.22) 1M.2@4063,2142.93 ; 4025.33,2137.9 cw(c4032.22,2109.12) 1M.2@4052.79,2130.4 ; 4025.33,2137.9 cw(c4032.22,2109.12) 1M.2@4052.79,2130.4 ; 4025.33,2137.9 cw(c4032.22,2109.12) 1M.2@4052.79,2130.4 ; 4025.33,2137.9 cw(c4032.22,2109.12) 1M.2@4052.79,2130.4 ; 4025.33,2137.9 cw(c4032.22,2109.12) 1M.2@4052.79,2130.4 ; 4026.32,2133.1 cw(c4035.62,2098.42) 1M.2@4055.05,2128.61 ; 4026.32,2133.1 cw(c4035.62,2098.42) 1M.2@4055.05,2128.61 ; 4026.32,2133.1 cw(c4035.62,2098.42) 1M.2@4055.05,2128.61 ; 4026.32,2133.1 cw(c4035.62,2098.42) 1M.2@4055.05,2128.61 ; 4026.32,2133.1 cw(c4035.62,2098.42) 1M.2@4055.05,2128.61 ; 4027.55,2142.93 cw(c4027.55,2107.48) 1M.2@4052.62,2132.55 ; 4027.55,2142.93 ccw(c4027.55,2178.38) 1M.2@4052.62,2153.31 ; 4027.55,2142.93 cw(c4027.55,2107.48) 1M.2@4052.62,2132.55 ; 4027.55,2142.93 ccw(c4027.55,2178.38) 1M.2@4052.62,2153.31 ; 4027.55,2142.93 ccw(c4027.55,2178.38) 1M.2@4052.62,2153.31 ; 4027.55,2142.93 cw(c4027.55,2107.48) 1M.2@4052.62,2132.55 ; 4032.7,2134.81 ccw(c4025.2,2162.78) 1M.2@4050.28,2148.3 ; 4032.7,2134.81 ccw(c4025.2,2162.78) 1M.2@4050.28,2148.3 ; 4032.7,2134.81 ccw(c4025.2,2162.78) 1M.2@4050.28,2148.3 ; 4032.7,2134.81 ccw(c4025.2,2162.78) 1M.2@4050.28,2148.3 ; 4032.7,2134.81 ccw(c4025.2,2162.78) 1M.2@4050.28,2148.3 ; 4040.8,2141.61 ccw(c4037.16,2156.81) 1M.2@4050.48,2148.64 ; 4040.8,2141.61 ccw(c4037.16,2156.81) 1M.2@4050.48,2148.64 ; 4040.8,2141.61 ccw(c4037.16,2156.81) 1M.2@4050.48,2148.64 ; 4040.8,2141.61 ccw(c4037.16,2156.81) 1M.2@4050.48,2148.64 ; 4040.8,2141.61 ccw(c4037.16,2156.81) 1M.2@4050.48,2148.64 ; 4043.05,2142.15 cw(c4047.24,2124.66) 1M.2@4059.74,2137.59 ; 4043.05,2142.15 cw(c4047.24,2124.66) 1M.2@4059.74,2137.59 ; 4043.05,2142.15 cw(c4047.24,2124.66) 1M.2@4059.74,2137.59 ; 4043.05,2142.15 cw(c4047.24,2124.66) 1M.2@4059.74,2137.59 ; 4043.05,2142.15 cw(c4047.24,2124.66) 1M.2@4059.74,2137.59 ; 12p.1@4050.62,2201.62 cw(c4025.55,2176.55) 4061,2176.55 ; 12p.1@4050.62,2201.62 cw(c4025.55,2176.55) 4061,2176.55 ; 12p.1@4050.62,2201.62 cw(c4025.55,2176.55) 4061,2176.55 ; 1M.2@4052.62,2155.28 ccw(c4032.38,2175.52) 4061,2175.52 ; 1M.2@4052.62,2155.28 ccw(c4032.38,2175.52) 4061,2175.52 ; 1M.2@4052.62,2155.28 ccw(c4032.38,2175.52) 4061,2175.52 ; 4061,2176.55 cw(c4096.45,2176.55) 12p.1@4071.38,2201.62 ; 4061,2176.55 cw(c4096.45,2176.55) 12p.1@4071.38,2201.62 ; 4061,2176.55 cw(c4096.45,2176.55) 12p.1@4071.38,2201.62 ; 4061,2185.18 ccw(c4103.28,2185.18) 1M.2@4073.38,2155.28 ; 4061,2185.18 ccw(c4103.28,2185.18) 1M.2@4073.38,2155.28 ; 4061,2185.18 ccw(c4103.28,2185.18) 1M.2@4073.38,2155.28
pads on no net: 7333.8 7350.8 *.8 ?.3@2312,1516.67 右旋编.1 左旋编.1 烧录.6 烧录.7 烧录.8 烧录.9 电解电容.2

## Polygon pours and split planes (outlines as drawn)
GND on Bottom Layer "Bottom Layer-No Net" (solid, remove dead copper, pour order 4): 1910,3110 2050,3250 6385,3250 6385,1855 5570,1040 5430,1180 1830,1180 1830,3085 1900,3155
GND on Top Layer "Bottom Layer-No Net" (solid, remove dead copper, pour order 6): 1705,3460 1925,3240 5825,3240 5825,1355 5670,1200 5610,1260 1950,1260 1950,3220 1705,3465

## Keep-outs
Keep-Out Layer:
  lines w10: 2100,1370 2105,1365 5755,1365 5760,1370 5760,3025 2100,3025 2100,1370

## Other copper
Top Layer:
  text "2018NNU" at 2830,1850 h50
  text "ALUS" at 2880,1735 h60
Bottom Layer:
  text "2018NNU ALUS" at 2640,2145 h60 r90

## Text inside footprints (layer, text, board x,y; h text height)
检测: Top Overlay "12" at 4110,2925 h40; Top Overlay "1" at 4150,2825 h40; Top Overlay "1" at 4110,2825 h40; Top Overlay "1" at 3460,2825 h40; Top Overlay "2" at 3450,2925 h40
电解电容: Top Overlay "+" at 2475,2255 h60
蜂鸣器: Top Overlay "+" at 5331,2203 h60 r180